# Altium PCB MBHP_CORE_LPC176x.PcbDoc (part 2 of 2)
Units mm, origin at the board's own origin, x right, y up, seen from the top; angles counter-clockwise.
Board outline 120 x 100 mm, 2 copper layers (Top Layer, Bottom Layer), stack 1.571 mm thick; 70 components, 109 nets, 446 pads, 2 vias.
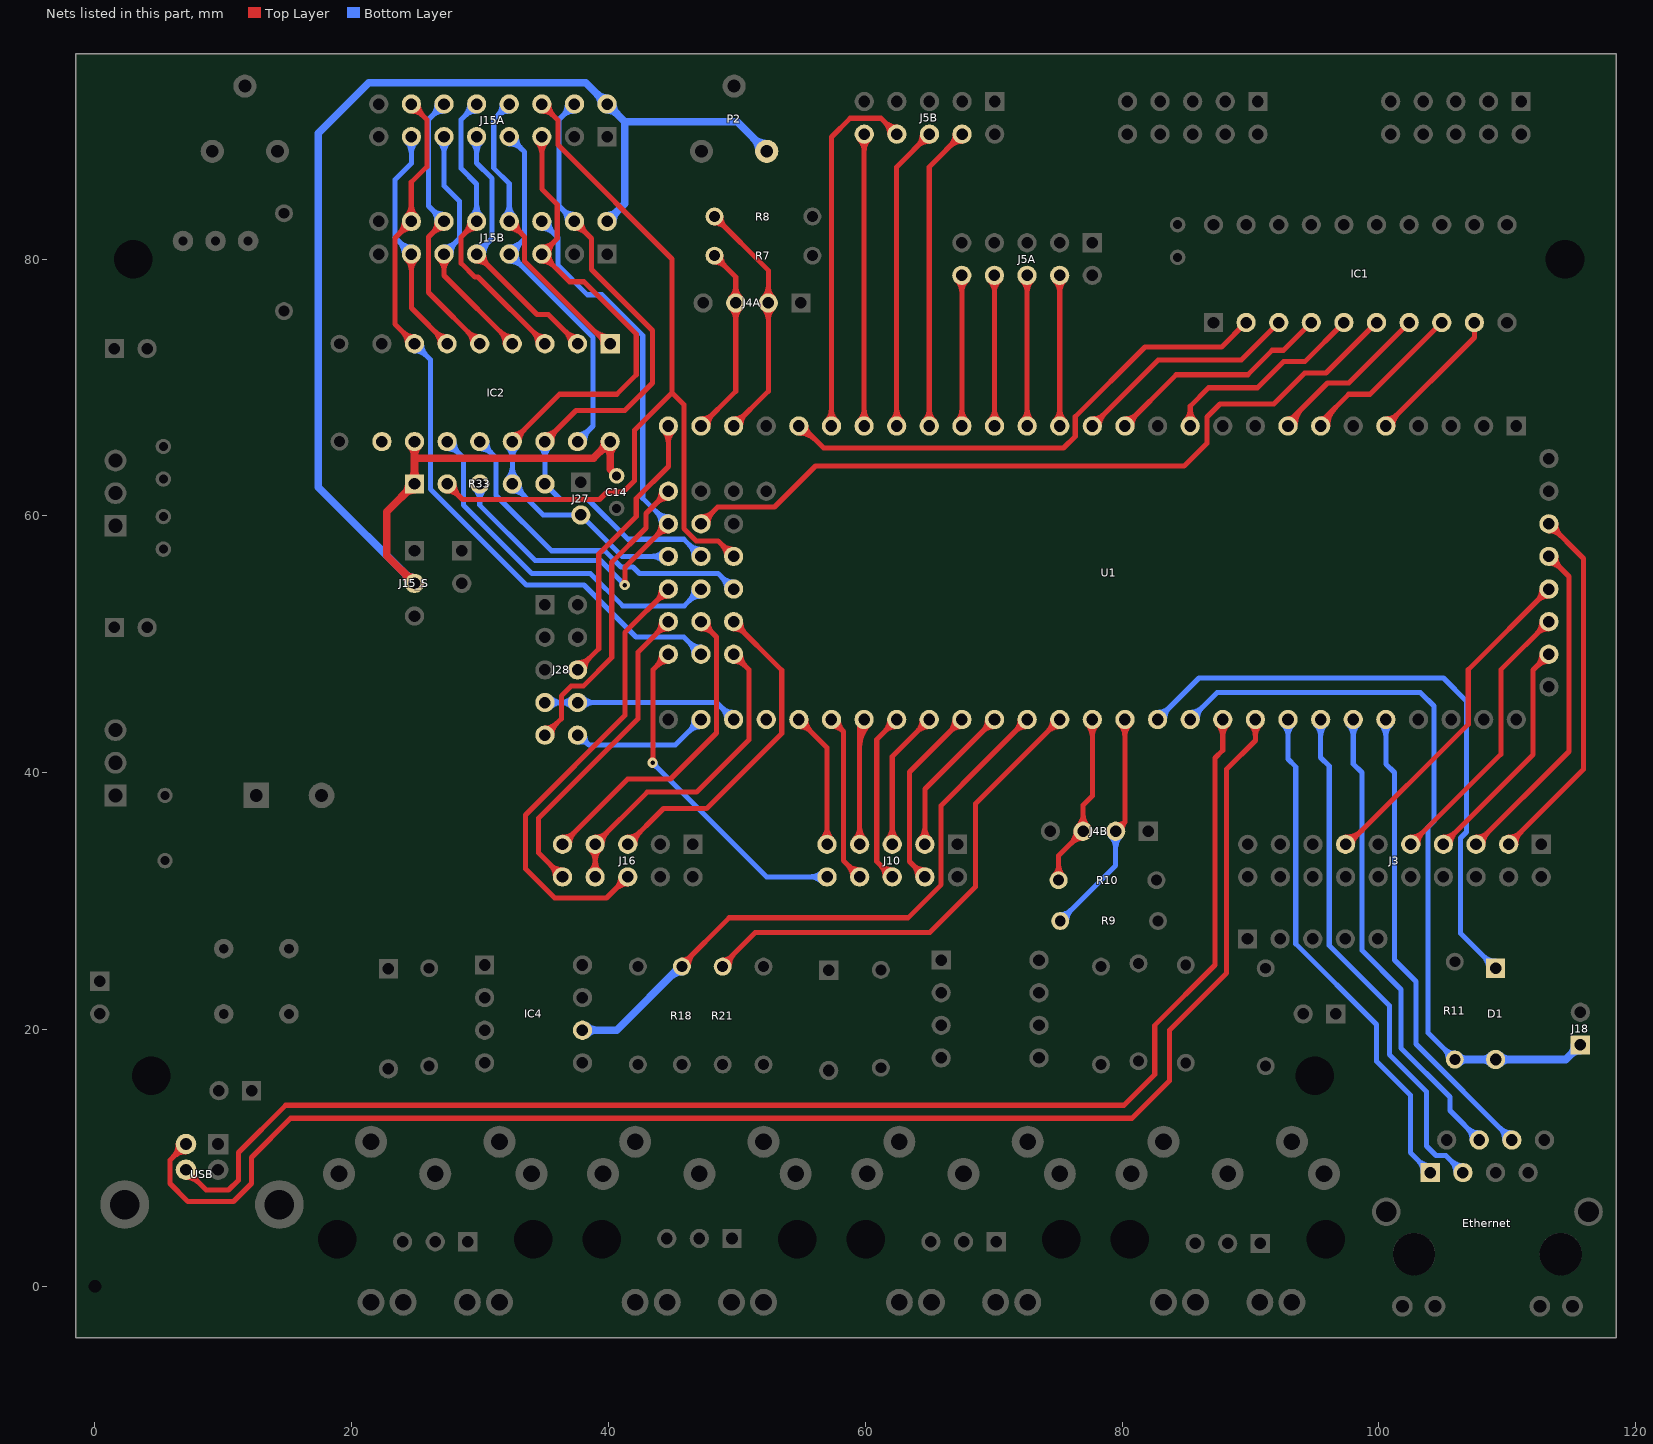
[diagram p2: the nets of this part, all layers, seen from the top]

## Via types
v1: diameter 0.8, hole 0.35, Top Layer to Bottom Layer, 2 vias

## Nets (pads, with @x,y where several pads share a name; then routed paths per layer and width w, separated by ;. In a path a pad name is that pad's centre, name@x,y a point inside that pad or via, vN(x,y) a via of type N, cw(c..) or ccw(c..) an arc to the next point about the centre after c; other vN are vias at no path point) (continued)
P0.2: J5B.10 U1.21 | length 26.9
  Top Layer w0.4: U1.21@59.518,67.389 ccw(c58.579,68.328) 59.907,68.328 ccw(c61.235,68.328) U1.21@60.296,67.389 ; J5B.10@59.531,89.341 cw(c58.624,88.434) 59.907,88.434 ; U1.21@59.907,67 J5B.10@59.907,89.73 ; 59.907,88.371 cw(c61.279,88.371) J5B.10@60.309,89.341
P0.3: J5B.8 U1.22 | length 32.9
  Top Layer w0.4: U1.22@56.978,67.389 ccw(c56.039,68.328) 57.367,68.328 ccw(c58.695,68.328) U1.22@57.756,67.389 ; U1.22@57.367,67 57.367,89.498 58.835,90.966 61.224,90.966 J5B.8@62.46,89.73 ; J5B.8@61.91,89.73 ccw(c60.582,89.73) 61.521,90.669 ccw(c62.46,91.608) J5B.8@62.46,90.28
P0.4: D1.1 J18.1 R11.1 U1.38 | length 69.7
  Bottom Layer w0.4: U1.38@85.307,44.14 87.395,46.228 103.251,46.228 104.291,45.188 104.291,36.219 103.825,35.753 103.825,19.746 R11.1@105.918,17.653 ; U1.38@85.307,44.69 ccw(c85.307,46.018) 86.246,45.079 ccw(c87.185,44.14) U1.38@85.857,44.14 ; R11.1@105.418,17.653 ccw(c104.211,17.653) 105.064,18.507 ccw(c105.918,19.36) R11.1@105.918,18.153
  Bottom Layer w0.6: R11.1@105.918,17.653 109.087,17.653 D1.1@109.093,17.659 114.56,17.659 J18.1@115.697,18.796 ; R11.1@106.201,17.37 cw(c106.884,16.687) 106.884,17.653 cw(c106.884,18.619) R11.1@106.201,17.936 ; 107.992,17.653 ccw(c107.992,18.76) D1.1@108.775,17.977 ; 108.021,17.653 cw(c108.021,16.587) D1.1@108.775,17.341 ; D1.1@109.411,17.341 cw(c110.179,16.573) 110.179,17.659 cw(c110.179,18.745) D1.1@109.411,17.977 ; J18.1@115.247,18.796 cw(c114.161,18.796) 114.929,18.028 cw(c115.697,17.26) J18.1@115.697,18.346
P0.5: D1.2 U1.39 | length 52.5
  Bottom Layer w0.4: U1.39@82.767,44.14 85.998,47.371 105.029,47.371 106.831,45.569 106.831,35.382 106.365,34.916 106.365,27.487 D1.2@109.093,24.759 ; U1.39@82.767,44.69 ccw(c82.767,46.018) 83.706,45.079 ccw(c84.645,44.14) U1.39@83.317,44.14 ; D1.2@108.543,24.759 ccw(c107.215,24.759) 108.154,25.698 ccw(c109.093,26.637) D1.2@109.093,25.309
P0.6: IC1.7 U1.8 | length 15.8
  Top Layer w0.4: U1.8@92.927,67 92.927,67.279 96.006,70.358 97.663,70.358 IC1.7@102.362,75.057 ; U1.8@92.927,67.55 ccw(c92.927,68.204) 93.39,67.742 ; U1.8@93.077,67 cw(c94.113,67) 93.38,67.732 ; U1.8@93.477,67 cw(c95.478,67) 94.063,68.415
P0.7: IC1.8 U1.7 | length 15.8
  Top Layer w0.4: U1.7@95.467,67 95.467,67.279 97.657,69.469 99.314,69.469 IC1.8@104.902,75.057 ; U1.7@95.467,67.55 ccw(c95.467,68.204) 95.93,67.742 ; U1.7@95.617,67 cw(c96.653,67) 95.92,67.732 ; U1.7@96.017,67 cw(c98.018,67) 96.603,68.415
P0.9: IC1.9 U1.5 | length 13
  Top Layer w0.4: U1.5@100.547,67 107.442,73.895 IC1.9@107.442,75.057 ; U1.5@100.547,67.55 ccw(c100.547,68.878) 101.486,67.939 ccw(c102.425,67) U1.5@101.097,67
P0.10: J4B.2 R9.2 U1.40 | length 25.2
  Top Layer w0.4: J4B.2@79.502,35.433 80.227,36.158 ; J4B.2@79.611,35.972 ccw(c79.746,36.639) 80.227,36.158 ; U1.40@79.838,43.751 cw(c78.899,42.812) 80.227,42.812 cw(c81.555,42.812) U1.40@80.616,43.751 ; J4B.2@80.041,35.542 cw(c80.708,35.677) 80.227,36.158 ; U1.40@80.227,44.14 80.227,36.158
  Bottom Layer w0.4: R9.2@75.184,28.448 79.502,32.766 J4B.2@79.502,35.433 ; R9.2@75.184,28.948 ccw(c75.184,30.155) 76.038,29.302 ccw(c76.891,28.448) R9.2@75.684,28.448 ; J4B.2@79.113,35.044 cw(c78.174,34.105) 79.502,34.105 cw(c80.83,34.105) J4B.2@79.891,35.044
P0.11: J4B.3 R10.2 U1.41 | length 21.8
  Top Layer w0.4: R10.2@74.703,31.977 ccw(c73.85,32.83) 75.057,32.83 ccw(c76.264,32.83) R10.2@75.411,31.977 ; R10.2@75.057,31.623 75.057,33.528 J4B.3@76.962,35.433 76.962,37.465 77.687,38.19 U1.41@77.687,44.14 ; J4B.3@76.412,35.433 cw(c75.084,35.433) 76.023,34.494 cw(c76.962,33.555) J4B.3@76.962,34.883 ; J4B.3@76.573,35.822 ccw(c75.634,36.761) 76.962,36.761 ccw(c78.29,36.761) J4B.3@77.351,35.822 ; U1.41@77.298,43.751 cw(c76.359,42.812) 77.687,42.812 cw(c79.015,42.812) U1.41@78.076,43.751
P0.15: IC1.4 U1.13 | length 19.9
  Top Layer w0.4: U1.13@80.227,67 84.22,70.993 89.789,70.993 91.694,72.898 92.583,72.898 IC1.4@94.742,75.057 ; U1.13@80.227,67.55 ccw(c80.227,68.878) 81.166,67.939 ccw(c82.105,67) U1.13@80.777,67
P0.16: IC1.3 U1.14 | length 19.9
  Top Layer w0.4: U1.14@77.687,67 82.823,72.136 89.281,72.136 IC1.3@92.202,75.057 ; U1.14@77.687,67.55 ccw(c77.687,68.878) 78.626,67.939 ccw(c79.565,67) U1.14@78.237,67
P0.18: IC1.5 U1.11 | length 18.3
  Top Layer w0.4: U1.11@84.918,67.389 ccw(c83.979,68.328) 85.307,68.328 ccw(c86.635,68.328) U1.11@85.696,67.389 ; U1.11@85.307,67 85.307,68.543 86.741,69.977 90.545,69.977 92.577,72.009 94.234,72.009 IC1.5@97.282,75.057
P0.21: IC1.2 U1.23 | length 43.3
  Top Layer w0.4: U1.23@54.827,66.45 cw(c54.827,64.591) 56.141,65.906 ; U1.23@54.827,66.85 cw(c54.827,65.957) 55.459,66.588 ; U1.23@54.827,67 55.047,67 56.769,65.278 75.438,65.278 76.351,66.191 76.351,67.715 81.788,73.152 87.757,73.152 IC1.2@89.662,75.057 ; U1.23@55.377,67 ccw(c56.174,67) 55.61,66.437
P0.23: J5A.4 U1.15 | length 15.9
  Top Layer w0.4: J5A.4@74.751,78.341 cw(c73.795,77.385) 75.147,77.385 ; U1.15@74.758,67.389 ccw(c73.819,68.328) 75.147,68.328 ccw(c76.475,68.328) U1.15@75.536,67.389 ; U1.15@75.147,67 J5A.4@75.147,78.73 ; 75.147,77.419 cw(c76.451,77.419) J5A.4@75.529,78.341
P0.24: J5A.6 U1.16 | length 16
  Top Layer w0.4: J5A.6@72.211,78.341 cw(c71.255,77.385) 72.607,77.385 ; U1.16@72.218,67.389 ccw(c71.279,68.328) 72.607,68.328 ccw(c73.935,68.328) U1.16@72.996,67.389 ; U1.16@72.607,66.929 J5A.6@72.607,78.73 ; 72.607,77.419 cw(c73.911,77.419) J5A.6@72.989,78.341
P0.25: J5A.8 U1.17 | length 15.9
  Top Layer w0.4: J5A.8@69.671,78.341 cw(c68.715,77.385) 70.067,77.385 ; U1.17@69.678,67.389 ccw(c68.739,68.328) 70.067,68.328 ccw(c71.395,68.328) U1.17@70.456,67.389 ; U1.17@70.067,67 J5A.8@70.067,78.73 ; 70.067,77.419 cw(c71.371,77.419) J5A.8@70.449,78.341
P0.26: J5A.10 U1.18 | length 15.9
  Top Layer w0.4: J5A.10@67.131,78.341 cw(c66.175,77.385) 67.527,77.385 ; U1.18@67.138,67.389 ccw(c66.199,68.328) 67.527,68.328 ccw(c68.855,68.328) U1.18@67.916,67.389 ; U1.18@67.527,67 J5A.10@67.527,78.73 ; 67.527,77.419 cw(c68.831,77.419) J5A.10@67.909,78.341
P0.27: J4A.2 R8.2 U1.25 | length 27.3
  Top Layer w0.4: R8.2@48.26,82.812 cw(c48.26,81.605) 49.114,82.458 cw(c49.967,83.312) R8.2@48.76,83.312 ; R8.2@48.26,83.312 52.451,79.121 J4A.2@52.451,76.581 52.451,69.704 U1.25@49.747,67 ; U1.25@49.747,67.55 ccw(c49.747,68.878) 50.686,67.939 ccw(c51.625,67) U1.25@50.297,67 ; J4A.2@52.062,76.192 cw(c51.123,75.253) 52.451,75.253 cw(c53.779,75.253) J4A.2@52.84,76.192 ; J4A.2@52.062,76.97 ccw(c51.123,77.909) 52.451,77.909 ccw(c53.779,77.909) J4A.2@52.84,76.97
P0.28: J4A.3 R7.2 U1.26 | length 23.2
  Top Layer w0.4: U1.26@47.207,67 49.911,69.704 J4A.3@49.911,76.581 49.911,78.613 R7.2@48.26,80.264 ; U1.26@47.207,67.55 ccw(c47.207,68.878) 48.146,67.939 ccw(c49.085,67) U1.26@47.757,67 ; R7.2@48.26,79.764 cw(c48.26,78.557) 49.114,79.41 cw(c49.967,80.264) R7.2@48.76,80.264 ; J4A.3@49.522,76.192 cw(c48.583,75.253) 49.911,75.253 cw(c51.239,75.253) J4A.3@50.3,76.192 ; J4A.3@49.522,76.97 ccw(c48.583,77.909) 49.911,77.909 ccw(c51.239,77.909) J4A.3@50.3,76.97
P1.18: J10.10 U1.81 | length 31.9
  Top Layer w0.4: v1@43.293,40.908 ccw(c42.881,41.32) 43.463,41.32 ; v1(43.434,40.767) 43.463,40.796 43.463,48.016 U1.81@44.667,49.22 ; 43.463,41.18 ccw(c43.847,41.18) v1@43.575,40.908 ; U1.81@44.117,49.22 cw(c42.789,49.22) 43.728,48.281 cw(c44.667,47.342) U1.81@44.667,48.67
  Bottom Layer w0.4: v1@43.434,40.567 cw(c43.434,40.084) 43.775,40.426 cw(c44.117,40.767) v1@43.634,40.767 ; v1(43.434,40.767) 52.324,31.877 J10.10@57.023,31.877 ; J10.10@56.634,31.488 ccw(c55.695,30.549) 55.695,31.877 ccw(c55.695,33.205) J10.10@56.634,32.266
P1.20: J16.7 J16.8 U1.79 | length 33.4
  Top Layer w0.4: J16.8@38.571,32.266 ccw(c37.632,33.205) 38.96,33.205 ccw(c40.288,33.205) J16.8@39.349,32.266 ; J16.7@38.571,34.028 cw(c37.632,33.089) 38.96,33.089 cw(c40.288,33.089) J16.7@39.349,34.028 ; J16.8@38.96,31.877 J16.7@38.96,34.417 43.024,38.481 46.863,38.481 50.927,42.545 50.951,42.545 50.951,48.016 U1.79@49.747,49.22 ; J16.7@38.96,34.967 ccw(c38.96,36.295) 39.899,35.356 ccw(c40.838,34.417) J16.7@39.51,34.417 ; U1.79@49.747,48.67 cw(c49.747,47.342) 50.686,48.281 cw(c51.625,49.22) U1.79@50.297,49.22
P1.21: J16.10 U1.78 | length 29
  Top Layer w0.4: J16.10@35.87,31.877 ccw(c34.542,31.877) 35.481,32.816 ccw(c36.42,33.755) J16.10@36.42,32.427 ; J16.10@36.42,31.877 34.544,33.753 34.544,36.449 42.291,44.196 42.291,49.384 U1.78@44.667,51.76 ; U1.78@44.117,51.76 cw(c42.789,51.76) 43.728,50.821 cw(c44.667,49.882) U1.78@44.667,51.21
P1.22: J16.9 U1.77 | length 28.9
  Top Layer w0.4: J16.9@36.42,34.417 41.5,39.497 44.831,39.497 48.411,43.077 48.411,50.556 U1.77@47.207,51.76 ; J16.9@36.42,34.967 ccw(c36.42,36.295) 37.359,35.356 ccw(c38.298,34.417) J16.9@36.97,34.417 ; U1.77@47.207,51.21 cw(c47.207,49.882) 48.146,50.821 cw(c49.085,51.76) U1.77@47.757,51.76
P1.23: J16.5 U1.76 | length 30
  Top Layer w0.4: J16.5@41.5,34.417 44.294,37.211 47.649,37.211 53.491,43.053 53.491,47.982 U1.76@49.73,51.743 ; J16.5@41.5,34.967 ccw(c41.5,36.295) 42.439,35.356 ccw(c43.378,34.417) J16.5@42.05,34.417 ; U1.76@49.747,51.21 cw(c49.747,49.964) 50.628,50.845 ; U1.76@50.297,51.76 ccw(c51.707,51.76) 50.71,50.763
P1.24: J16.6 U1.75 | length 40.2
  Top Layer w0.4: J16.6@40.95,31.877 cw(c39.622,31.877) 40.561,30.938 cw(c41.5,29.999) J16.6@41.5,31.327 ; J16.6@41.5,31.877 39.849,30.226 35.814,30.226 33.528,32.512 33.528,36.703 41.275,44.45 41.275,50.908 U1.75@44.667,54.3 ; U1.75@44.117,54.3 cw(c42.789,54.3) 43.728,53.361 cw(c44.667,52.422) U1.75@44.667,53.75
P1.25: IC2.11 U1.74 | length 31.9
  Bottom Layer w0.4: IC2.11@27.432,65.236 cw(c27.432,63.908) 28.371,64.847 cw(c29.31,65.786) IC2.11@27.982,65.786 ; IC2.11@27.432,65.786 28.702,64.516 28.702,60.833 34.036,55.499 38.608,55.499 41.114,52.993 45.9,52.993 U1.74@47.207,54.3 ; U1.74@46.657,54.3 cw(c45.329,54.3) 46.268,53.361 cw(c47.207,52.422) U1.74@47.207,53.75
P1.26: IC2.12 U1.73 | length 30.4
  Bottom Layer w0.4: IC2.12@29.972,65.236 cw(c29.972,63.908) 30.911,64.847 cw(c31.85,65.786) IC2.12@30.522,65.786 ; IC2.12@29.972,65.786 31.242,64.516 31.242,61.595 35.56,57.277 39.715,57.277 40.985,56.007 41.91,56.007 42.413,55.504 48.543,55.504 U1.73@49.747,54.3 ; U1.73@49.197,54.3 ccw(c47.869,54.3) 48.808,55.239 ccw(c49.747,56.178) U1.73@49.747,54.85
P1.27: IC2.13 J15A.11 J15B.11 J27.2 R33.4 U1.72 | length 69.5
  Top Layer w0.4: IC2.13@32.512,65.786 36.195,69.469 40.64,69.469 42.164,70.993 42.164,74.168 38.1,78.232 36.957,78.232 34.81,80.379 J15B.11@34.81,80.391 36.014,81.595 36.014,84.255 34.81,85.459 J15A.11@34.81,89.535 ; IC2.13@32.512,66.336 ccw(c32.512,67.664) 33.451,66.725 ccw(c34.39,65.786) IC2.13@33.062,65.786 ; J15A.11@34.421,89.146 cw(c33.482,88.207) 34.81,88.207 cw(c36.138,88.207) J15A.11@35.199,89.146 ; J15B.11@34.81,79.841 cw(c34.81,78.542) 35.728,79.461 ; J15B.11@34.81,80.941 ccw(c34.81,82.269) 35.749,81.33 ccw(c36.688,80.391) 35.36,80.391 ccw(c36.717,80.391) 35.757,79.432
  Bottom Layer w0.4: R33.4@32.123,62.873 ccw(c31.184,63.812) 32.512,63.812 ccw(c33.84,63.812) R33.4@32.901,62.873 ; IC2.13@32.123,65.397 cw(c31.184,64.458) 32.512,64.458 cw(c33.84,64.458) IC2.13@32.901,65.397 ; R33.4@32.512,61.934 cw(c32.512,60.606) 33.451,61.545 cw(c34.39,62.484) R33.4@33.062,62.484 ; IC2.13@32.512,65.786 R33.4@32.512,62.484 34.925,60.071 J27.2@37.846,60.071 41.077,56.84 U1.72@44.667,56.84 ; U1.72@44.278,56.451 ccw(c43.339,55.512) 43.339,56.84 ccw(c43.339,58.168) U1.72@44.278,57.229
P1.28: IC2.14 J15A.14 J15B.14 R33.5 U1.71 | length 65.8
  Top Layer w0.4: IC2.14@35.052,65.786 37.465,68.199 41.275,68.199 43.434,70.358 43.434,74.439 38.686,79.187 38.686,81.595 J15B.14@37.35,82.931 ; IC2.14@35.052,66.336 ccw(c35.052,67.664) 35.991,66.725 ccw(c36.93,65.786) IC2.14@35.602,65.786 ; J15B.14@37.35,82.381 cw(c37.35,81.053) 38.289,81.992 cw(c39.228,82.931) J15B.14@37.9,82.931
  Bottom Layer w0.4: IC2.14@34.663,65.397 cw(c33.724,64.458) 35.052,64.458 cw(c36.38,64.458) IC2.14@35.441,65.397 ; IC2.14@35.052,65.786 R33.5@35.052,62.484 36.256,61.28 38.415,61.28 41.519,58.176 45.871,58.176 U1.71@47.207,56.84 ; J15B.14@36.8,82.931 ccw(c35.472,82.931) 36.411,83.87 ccw(c37.35,84.809) J15B.14@37.35,83.481 ; J15A.14@36.8,92.075 cw(c35.472,92.075) 36.411,91.136 cw(c37.35,90.197) J15A.14@37.35,91.525 ; J15B.14@37.35,82.931 36.146,84.135 36.146,90.871 J15A.14@37.35,92.075 ; U1.71@46.657,56.84 ccw(c45.329,56.84) 46.268,57.779 ccw(c47.207,58.718) U1.71@47.207,57.39
P1.29: J15A.12 R33.2 U1.70 | length 72.5
  Top Layer w0.4: R33.2@27.432,61.934 cw(c27.432,60.606) 28.371,61.545 cw(c29.31,62.484) R33.2@27.982,62.484 ; R33.2@27.432,62.484 28.636,61.28 39.309,61.28 39.878,61.849 41.148,61.849 42.037,62.738 42.037,66.675 44.958,69.596 ; J15A.12@34.81,91.525 cw(c34.81,90.197) 35.749,91.136 cw(c36.688,92.075) J15A.12@35.36,92.075 ; J15A.12@34.81,92.075 36.068,90.817 36.068,88.9 44.958,80.01 44.958,69.596 ; U1.70@49.197,56.84 ccw(c47.869,56.84) 48.808,57.779 ccw(c49.747,58.718) U1.70@49.747,57.39 ; U1.70@49.747,56.84 48.543,58.044 46.84,58.044 45.871,59.013 45.871,68.683 44.958,69.596
P1.30: J5B.4 U1.19 | length 28
  Top Layer w0.4: U1.19@64.598,67.389 ccw(c63.659,68.328) 64.987,68.328 ccw(c66.315,68.328) U1.19@65.376,67.389 ; U1.19@64.987,67 64.987,87.177 J5B.4@67.54,89.73 ; J5B.4@66.99,89.73 cw(c65.662,89.73) 66.601,88.791 cw(c67.54,87.852) J5B.4@67.54,89.18
P1.31: J5B.6 U1.20 | length 28
  Top Layer w0.4: U1.20@62.058,67.389 ccw(c61.119,68.328) 62.447,68.328 ccw(c63.775,68.328) U1.20@62.836,67.389 ; U1.20@62.447,66.929 62.447,87.177 J5B.6@65,89.73 ; J5B.6@64.45,89.73 cw(c63.122,89.73) 64.061,88.791 cw(c65,87.852) J5B.6@65,89.18
P2.0: R21.1 U1.42 | length 41.9
  Top Layer w0.4: R21.1@48.895,25.019 51.435,27.559 65.024,27.559 68.58,31.115 68.58,37.573 U1.42@75.147,44.14 ; R21.1@48.895,25.392 ccw(c48.895,26.293) 49.532,25.656 ; R21.1@49.395,24.892 cw(c50.909,24.892) 49.838,25.962 ; U1.42@74.597,44.14 cw(c73.269,44.14) 74.208,43.201 cw(c75.147,42.262) U1.42@75.147,43.59
P2.1: IC4.6 R18.1 U1.43 | length 55.5
  Top Layer w0.4: R18.1@45.72,25.019 49.403,28.702 63.341,28.702 65.913,31.274 65.913,37.446 69.215,40.748 U1.43@72.607,44.14 ; R18.1@45.72,25.392 ccw(c45.72,26.292) 46.357,25.656 ; R18.1@46.22,24.892 cw(c47.734,24.892) 46.663,25.962 ; U1.43@72.057,44.14 cw(c70.729,44.14) 71.668,43.201 cw(c72.607,42.262) U1.43@72.607,43.59
  Bottom Layer w0.6: IC4.6@37.973,19.939 40.64,19.939 R18.1@45.72,25.019 ; IC4.6@38.291,19.621 cw(c39.059,18.853) 39.059,19.939 cw(c39.059,21.025) IC4.6@38.291,20.257 ; 44.82,24.119 cw(c45.72,23.22) R18.1@45.72,24.492 ; 45.127,24.426 ccw(c44.661,24.892) R18.1@45.32,24.892
P2.2: J10.3 U1.44 | length 16.1
  Top Layer w0.4: J10.3@64.254,34.806 ccw(c63.315,35.745) 64.643,35.745 ccw(c65.971,35.745) J10.3@65.032,34.806 ; J10.3@64.643,34.417 64.643,38.716 U1.44@70.067,44.14 ; U1.44@69.517,44.14 cw(c68.189,44.14) 69.128,43.201 cw(c70.067,42.262) U1.44@70.067,43.59
P2.3: J10.4 U1.45 | length 18.6
  Top Layer w0.4: J10.4@64.093,31.877 ccw(c62.765,31.877) 63.704,32.816 ccw(c64.643,33.755) J10.4@64.643,32.427 ; J10.4@64.643,31.877 63.439,33.081 63.439,40.052 U1.45@67.527,44.14 ; U1.45@66.977,44.14 cw(c65.649,44.14) 66.588,43.201 cw(c67.527,42.262) U1.45@67.527,43.59
P2.4: J10.5 U1.46 | length 15.1
  Top Layer w0.4: J10.5@61.714,34.806 ccw(c60.775,35.745) 62.103,35.745 ccw(c63.431,35.745) J10.5@62.492,34.806 ; J10.5@62.103,34.417 62.103,41.256 U1.46@64.987,44.14 ; U1.46@64.437,44.14 cw(c63.109,44.14) 64.048,43.201 cw(c64.987,42.262) U1.46@64.987,43.59
P2.5: J10.6 U1.47 | length 17.6
  Top Layer w0.4: J10.6@61.553,31.877 ccw(c60.225,31.877) 61.164,32.816 ccw(c62.103,33.755) J10.6@62.103,32.427 ; U1.47@61.897,44.14 cw(c60.569,44.14) 61.508,43.201 cw(c62.447,42.262) U1.47@62.447,43.59 ; J10.6@62.103,31.877 60.899,33.081 60.899,42.592 U1.47@62.447,44.14
P2.6: J10.7 U1.48 | length 15.1
  Top Layer w0.4: J10.7@59.174,34.806 ccw(c58.235,35.745) 59.563,35.745 ccw(c60.891,35.745) J10.7@59.952,34.806 ; J10.7@59.563,34.417 59.563,43.796 U1.48@59.907,44.14 ; 59.563,41.982 cw(c62.065,41.982) U1.48@60.296,43.751 ; 59.563,42.947 cw(c61.1,42.947) U1.48@60.013,44.034
P2.7: J10.8 U1.49 | length 17.3
  Top Layer w0.4: U1.49@57.367,44.14 58.293,43.214 ; U1.49@57.372,43.59 cw(c57.385,42.306) 58.293,43.214 ; U1.49@57.917,44.135 ccw(c59.201,44.122) 58.293,43.214 ; J10.8@59.013,31.877 ccw(c57.685,31.877) 58.624,32.816 ccw(c59.563,33.755) J10.8@59.563,32.427 ; J10.8@59.563,31.877 58.293,33.147 58.293,43.214
P2.8: J10.9 U1.50 | length 14.8
  Top Layer w0.4: U1.50@54.827,43.59 cw(c54.827,42.262) 55.766,43.201 cw(c56.705,44.14) U1.50@55.377,44.14 ; U1.50@54.827,44.14 57.023,41.944 J10.9@57.023,34.417 ; J10.9@56.634,34.806 ccw(c55.695,35.745) 57.023,35.745 ccw(c58.351,35.745) J10.9@57.412,34.806
P2.10: U1.51
P2.11: J28.7 J28.8 U1.52 | length 23.6
  Bottom Layer w0.4: J28.7@35.052,45.466 48.421,45.466 U1.52@49.747,44.14 ; J28.7@35.441,45.071 cw(c36.394,44.118) 36.394,45.466 ; J28.7@35.441,45.849 ccw(c36.365,46.773) 36.365,45.466 ; 36.25,45.466 cw(c36.25,44.118) J28.8@37.203,45.071 ; 36.279,45.466 ccw(c36.279,46.773) J28.8@37.203,45.849 ; J28.8@37.981,45.071 cw(c38.934,44.118) 38.934,45.466 ; J28.8@37.981,45.849 ccw(c38.905,46.773) 38.905,45.466 ; U1.52@49.197,44.14 ccw(c47.869,44.14) 48.808,45.079 ccw(c49.747,46.018) U1.52@49.747,44.69
P2.12: J28.10 U1.53 | length 14.2
  Bottom Layer w0.4: J28.10@37.715,42.384 cw(c37.899,41.583) 38.481,42.164 ; J28.10@37.846,42.799 38.481,42.164 ; J28.10@38.142,42.92 ccw(c39.149,42.92) 38.437,42.208 ; U1.53@46.657,44.14 cw(c45.329,44.14) 46.268,43.201 cw(c47.207,42.262) U1.53@47.207,43.59 ; U1.53@47.207,44.14 45.231,42.164 38.481,42.164
P2.13: J28.6 U1.27 | length 26.1
  Top Layer w0.4: J28.6@37.592,48 39.243,49.651 39.243,57.023 42.164,59.944 42.164,61.341 44.667,63.844 U1.27@44.667,67 ; J28.6@37.592,48.55 ccw(c37.592,49.878) 38.531,48.939 ccw(c39.47,48) J28.6@38.142,48 ; U1.27@44.278,66.611 cw(c43.339,65.672) 44.667,65.672 cw(c45.995,65.672) U1.27@45.056,66.611
P3.25: J15B.12 R33.3 U1.69 | length 59.9
  Top Layer w0.4: v1@41.134,54.751 ccw(c40.792,55.093) 41.275,55.093 ccw(c41.758,55.093) v1@41.416,54.751 ; v1(41.275,54.61) 41.275,55.988 U1.69@44.667,59.38 ; U1.69@44.117,59.38 cw(c42.789,59.38) 43.728,58.441 cw(c44.667,57.502) U1.69@44.667,58.83
  Bottom Layer w0.4: R33.3@29.583,62.095 cw(c28.644,61.156) 29.972,61.156 cw(c31.3,61.156) R33.3@30.361,62.095 ; R33.3@29.972,62.484 29.972,60.833 34.29,56.515 39.37,56.515 v1(41.275,54.61) ; J15B.12@34.81,82.381 cw(c34.81,81.053) 35.749,81.992 cw(c36.688,82.931) J15B.12@35.36,82.931 ; J15B.12@34.81,82.931 36.07,81.671 36.07,79.5 38.354,77.216 39.497,77.216 42.672,74.041 42.672,61.375 U1.69@44.667,59.38 ; v1@41.075,54.61 ccw(c40.592,54.61) 40.934,54.951 ccw(c41.275,55.293) v1@41.275,54.81 ; U1.69@44.117,59.38 ccw(c42.789,59.38) 43.728,60.319 ccw(c44.667,61.258) U1.69@44.667,59.93
P3.26: IC1.6 U1.68 | length 62.4
  Top Layer w0.4: U1.68@47.207,59.38 48.516,60.689 52.942,60.689 56.134,63.881 84.836,63.881 86.614,65.659 86.614,67.691 87.63,68.707 91.815,68.707 94.228,71.12 95.885,71.12 IC1.6@99.822,75.057 ; U1.68@47.207,59.93 ccw(c47.207,61.258) 48.146,60.319 ccw(c49.085,59.38) U1.68@47.757,59.38
P4.29: J28.9 U1.66 | length 27.7
  Top Layer w0.4: J28.9@35.052,42.92 36.328,44.196 36.328,45.98 37.084,46.736 38.031,46.736 40.259,48.964 40.259,56.393 42.926,59.06 42.926,60.179 U1.66@44.667,61.92 ; J28.9@35.052,43.47 ccw(c35.052,44.798) 35.991,43.859 ccw(c36.93,42.92) J28.9@35.602,42.92 ; U1.66@44.117,61.92 cw(c42.789,61.92) 43.728,60.981 cw(c44.667,60.042) U1.66@44.667,61.37
Q0: IC2.15 J15A.9 J15B.9 | length 36.3
  Bottom Layer w0.4: J15B.9@32.27,79.841 cw(c32.27,78.417) 33.277,79.424 ; J15B.9@32.27,80.941 ccw(c32.27,82.269) 33.209,81.33 ccw(c34.148,80.391) 32.82,80.391 ccw(c34.052,80.391) 33.181,79.52 ; J15A.9@32.27,88.985 cw(c32.27,87.657) 33.209,88.596 cw(c34.148,89.535) J15A.9@32.82,89.535 ; J15A.9@32.27,89.535 33.474,88.331 33.474,81.595 J15B.9@32.27,80.391 32.31,80.391 38.796,73.905 38.796,66.99 IC2.15@37.592,65.786 ; IC2.15@37.592,66.336 ccw(c37.592,67.664) 38.531,66.725 ccw(c39.47,65.786) IC2.15@38.142,65.786
Q1: IC2.1 J15A.10 J15B.10 | length 32.2
  Top Layer w0.4: J15B.10@32.27,82.381 cw(c32.27,81.053) 33.209,81.992 cw(c34.148,82.931) J15B.10@32.82,82.931 ; J15B.10@32.27,82.931 33.474,81.727 33.474,79.81 39.878,73.406 IC2.1@40.132,73.406 ; 38.759,74.525 ccw(c40.132,75.897) IC2.1@40.132,73.956 ; 39.373,73.911 cw(c38.867,73.406) IC2.1@39.582,73.406 ; IC2.1@39.442,73.842 ccw(c40.132,74.531) IC2.1@40.132,73.556
  Bottom Layer w0.4: J15A.10@31.72,92.075 cw(c30.392,92.075) 31.331,91.136 cw(c32.27,90.197) J15A.10@32.27,91.525 ; J15B.10@31.881,83.32 ccw(c30.942,84.259) 32.27,84.259 ccw(c33.598,84.259) J15B.10@32.659,83.32 ; J15B.10@32.27,82.931 32.27,85.876 31.066,87.08 31.066,90.871 J15A.10@32.27,92.075
Q2: IC2.2 J15A.7 J15B.7 | length 29.2
  Top Layer w0.4: J15B.7@29.73,79.841 cw(c29.73,78.513) 30.669,79.452 cw(c31.608,80.391) J15B.7@30.28,80.391 ; J15B.7@29.73,80.391 34.429,75.692 35.306,75.692 IC2.2@37.592,73.406 ; IC2.2@37.042,73.406 ccw(c35.714,73.406) 36.653,74.345 ccw(c37.592,75.284) IC2.2@37.592,73.956
  Bottom Layer w0.4: J15A.7@29.341,89.146 cw(c28.402,88.207) 29.73,88.207 cw(c31.058,88.207) J15A.7@30.119,89.146 ; J15B.7@29.73,80.391 30.934,81.595 30.934,86.287 29.73,87.491 J15A.7@29.73,89.535 ; J15B.7@29.73,80.941 ccw(c29.73,82.269) 30.669,81.33 ccw(c31.608,80.391) J15B.7@30.28,80.391
Q3: IC2.3 J15A.8 J15B.8 | length 31.4
  Top Layer w0.4: J15B.8@29.18,82.931 cw(c27.852,82.931) 28.791,81.992 cw(c29.73,81.053) J15B.8@29.73,82.381 ; J15B.8@29.73,82.931 28.526,81.727 28.526,79.678 29.591,78.613 29.845,78.613 IC2.3@35.052,73.406 ; IC2.3@34.502,73.406 ccw(c33.174,73.406) 34.113,74.345 ccw(c35.052,75.284) IC2.3@35.052,73.956
  Bottom Layer w0.4: J15A.8@29.18,92.075 cw(c27.852,92.075) 28.791,91.136 cw(c29.73,90.197) J15A.8@29.73,91.525 ; J15B.8@29.341,83.32 ccw(c28.402,84.259) 29.73,84.259 ccw(c31.058,84.259) J15B.8@30.119,83.32 ; J15B.8@29.73,82.931 29.73,85.84 28.526,87.044 28.526,90.871 J15A.8@29.73,92.075
Q4: IC2.4 J15A.5 J15B.5 | length 27.7
  Top Layer w0.4: J15B.5@26.801,80.002 cw(c25.862,79.063) 27.19,79.063 cw(c28.518,79.063) J15B.5@27.579,80.002 ; J15B.5@27.19,80.391 27.19,78.728 IC2.4@32.512,73.406 ; IC2.4@31.962,73.406 ccw(c30.634,73.406) 31.573,74.345 ccw(c32.512,75.284) IC2.4@32.512,73.956
  Bottom Layer w0.4: J15A.5@26.801,89.146 cw(c25.862,88.207) 27.19,88.207 cw(c28.518,88.207) J15A.5@27.579,89.146 ; J15B.5@27.19,80.391 28.394,81.595 28.394,84.509 27.19,85.713 J15A.5@27.19,89.535 ; J15B.5@27.19,80.941 ccw(c27.19,82.269) 28.129,81.33 ccw(c29.068,80.391) J15B.5@27.74,80.391
Q5: IC2.5 J15A.6 J15B.6 | length 30.2
  Top Layer w0.4: J15B.6@26.64,82.931 cw(c25.312,82.931) 26.251,81.992 cw(c27.19,81.053) J15B.6@27.19,82.381 ; J15B.6@27.19,82.931 25.986,81.727 25.986,77.392 IC2.5@29.972,73.406 ; IC2.5@29.422,73.406 ccw(c28.094,73.406) 29.033,74.345 ccw(c29.972,75.284) IC2.5@29.972,73.956
  Bottom Layer w0.4: J15B.6@26.64,82.931 ccw(c25.312,82.931) 26.251,83.87 ccw(c27.19,84.809) J15B.6@27.19,83.481 ; J15A.6@26.64,92.075 cw(c25.312,92.075) 26.251,91.136 cw(c27.19,90.197) J15A.6@27.19,91.525 ; J15B.6@27.19,82.931 25.986,84.135 25.986,90.871 J15A.6@27.19,92.075
Q6: IC2.6 J15A.3 J15B.3 | length 26.7
  Top Layer w0.4: J15B.3@24.261,80.002 cw(c23.322,79.063) 24.65,79.063 cw(c25.978,79.063) J15B.3@25.039,80.002 ; J15B.3@24.65,80.391 24.65,76.188 IC2.6@27.432,73.406 ; IC2.6@26.882,73.406 ccw(c25.554,73.406) 26.493,74.345 ccw(c27.432,75.284) IC2.6@27.432,73.956
  Bottom Layer w0.4: J15B.3@24.1,80.391 ccw(c22.772,80.391) 23.711,81.33 ccw(c24.65,82.269) J15B.3@24.65,80.941 ; J15A.3@24.261,89.146 cw(c23.322,88.207) 24.65,88.207 cw(c25.978,88.207) J15A.3@25.039,89.146 ; J15B.3@24.65,80.391 23.368,81.673 23.368,86.173 24.65,87.455 J15A.3@24.65,89.535
Q7: IC2.7 J15A.4 J15B.4 U1.80 | length 71.6
  Top Layer w0.4: J15B.4@24.1,82.931 cw(c22.772,82.931) 23.711,81.992 cw(c24.65,81.053) J15B.4@24.65,82.381 ; J15B.4@24.261,83.32 ccw(c23.351,84.23) 24.638,84.23 ; IC2.7@24.342,73.406 ccw(c23.014,73.406) 23.953,74.345 ccw(c24.892,75.284) IC2.7@24.892,73.956 ; J15B.4@24.638,82.943 24.638,85.979 25.854,87.195 25.854,90.871 J15A.4@24.65,92.075 ; 24.638,84.288 ccw(c26.007,84.288) J15B.4@25.039,83.32 ; J15B.4@24.65,82.931 23.368,81.649 23.368,74.93 IC2.7@24.892,73.406 ; J15A.4@24.65,91.525 cw(c24.65,90.197) 25.589,91.136 cw(c26.528,92.075) J15A.4@25.2,92.075
  Bottom Layer w0.4: J15B.4@24.638,82.943 J15B.4@24.65,82.931 ; IC2.7@24.892,72.856 cw(c24.892,71.528) 25.831,72.467 cw(c26.77,73.406) IC2.7@25.442,73.406 ; IC2.7@24.892,73.406 26.134,72.164 26.134,62.079 33.603,54.61 38.1,54.61 42.154,50.556 45.871,50.556 U1.80@47.207,49.22 ; U1.80@46.657,49.22 ccw(c45.329,49.22) 46.268,50.159 ccw(c47.207,51.098) U1.80@47.207,49.77
Q8: IC2.9
RD+: Ethernet.4 U1.33 | length 41
  Bottom Layer w0.4: U1.33@97.618,43.751 cw(c96.679,42.812) 98.007,42.812 cw(c99.335,42.812) U1.33@98.396,43.751 ; U1.33@98.007,44.14 98.007,40.677 98.679,40.005 98.679,26.162 101.727,23.114 101.727,18.542 105.535,14.734 105.535,13.675 Ethernet.4@107.82,11.39 ; Ethernet.4@107.27,11.39 ccw(c105.942,11.39) 106.881,12.329 ccw(c107.82,13.268) Ethernet.4@107.82,11.94
RD-: Ethernet.6 U1.32 | length 41
  Bottom Layer w0.4: U1.32@100.158,43.751 cw(c99.219,42.812) 100.547,42.812 cw(c101.875,42.812) U1.32@100.936,43.751 ; U1.32@100.547,44.14 100.547,40.677 101.219,40.005 101.219,35.137 101.221,35.135 101.221,25.401 102.889,23.733 102.889,18.861 Ethernet.6@110.36,11.39 ; Ethernet.6@109.81,11.39 ccw(c108.482,11.39) 109.421,12.329 ccw(c110.36,13.268) Ethernet.6@110.36,11.94
TCK: J3.9 U1.57 | length 26
  Top Layer w0.4: J3.9@102.489,34.417 109.503,41.431 109.503,48.016 U1.57@113.247,51.76 ; J3.9@102.489,34.967 ccw(c102.489,36.295) 103.428,35.356 ccw(c104.367,34.417) J3.9@103.039,34.417 ; U1.57@112.697,51.76 cw(c111.369,51.76) 112.308,50.821 cw(c113.247,49.882) U1.57@113.247,51.21
TD+: Ethernet.1 U1.35 | length 44.1
  Bottom Layer w0.4: U1.35@92.538,43.751 cw(c91.599,42.812) 92.927,42.812 cw(c94.255,42.812) U1.35@93.316,43.751 ; U1.35@92.927,44.14 92.927,41.058 93.533,40.452 93.533,26.665 99.822,20.376 99.822,17.526 102.452,14.896 102.452,10.408 Ethernet.1@104.01,8.85 ; Ethernet.1@103.46,8.85 ccw(c102.132,8.85) 103.071,9.789 ccw(c104.01,10.728) Ethernet.1@104.01,9.4
TD-: Ethernet.3 U1.34 | length 44.5
  Bottom Layer w0.4: U1.34@95.078,43.751 cw(c94.139,42.812) 95.467,42.812 cw(c96.795,42.812) U1.34@95.856,43.751 ; U1.34@95.467,44.14 95.467,41.185 96.139,40.513 96.139,26.543 100.838,21.844 100.838,18.034 103.722,15.15 103.722,10.922 104.458,10.186 105.214,10.186 Ethernet.3@106.55,8.85 ; Ethernet.3@106,8.85 ccw(c104.672,8.85) 105.611,9.789 ccw(c106.55,10.728) Ethernet.3@106.55,9.4
TDI: J3.5 U1.59 | length 30.2
  Top Layer w0.4: J3.5@107.569,34.417 114.808,41.656 114.808,55.279 U1.59@113.247,56.84 ; J3.5@107.569,34.967 ccw(c107.569,36.295) 108.508,35.356 ccw(c109.447,34.417) J3.5@108.119,34.417 ; U1.59@113.247,56.29 cw(c113.247,54.962) 114.186,55.901 cw(c115.125,56.84) U1.59@113.797,56.84
TDO: J3.13 U1.58 | length 30.7
  Top Layer w0.4: J3.13@97.409,34.417 97.607,34.417 106.963,43.773 106.963,48.016 U1.58@113.247,54.3 ; J3.13@97.409,34.967 ccw(c97.409,36.772) 98.685,35.496 ; J3.13@97.959,34.417 cw(c98.809,34.417) 98.208,35.018 ; U1.58@112.697,54.3 cw(c111.369,54.3) 112.308,53.361 cw(c113.247,52.422) U1.58@113.247,53.75
TMS: J3.7 U1.56 | length 22.4
  Top Layer w0.4: J3.7@105.029,34.417 112.014,41.402 112.014,47.987 U1.56@113.247,49.22 ; J3.7@105.029,34.967 ccw(c105.029,36.295) 105.968,35.356 ccw(c106.907,34.417) J3.7@105.579,34.417 ; U1.56@112.697,49.22 cw(c111.369,49.22) 112.308,48.281 cw(c113.247,47.342) U1.56@113.247,48.67
TRST: J3.3 U1.60 | length 32.7
  Top Layer w0.4: J3.3@110.109,34.417 115.951,40.259 115.951,56.676 U1.60@113.247,59.38 ; J3.3@110.109,34.967 ccw(c110.109,36.295) 111.048,35.356 ccw(c111.987,34.417) J3.3@110.659,34.417 ; U1.60@113.247,58.83 cw(c113.247,57.502) 114.186,58.441 cw(c115.125,59.38) U1.60@113.797,59.38
"USB D+": U1.37 USB.3 | length 115.4
  Top Layer w0.4: USB.3@7.095,8.473 cw(c7.095,7.024) 8.119,8.049 cw(c9.144,9.073) USB.3@7.695,9.073 ; USB.3@7.183,9.073 USB.3@7.095,9.073 8.675,7.493 10.414,7.493 11.176,8.255 11.176,10.414 14.859,14.097 80.137,14.097 ; 80.145,14.089 82.55,16.493 82.55,20.32 87.249,25.019 87.249,41.148 87.847,41.746 U1.37@87.847,44.14 ; U1.37@87.458,43.751 cw(c86.519,42.812) 87.847,42.812 cw(c89.175,42.812) U1.37@88.236,43.751
"USB D-": U1.36 USB.2 | length 122.4
  Top Layer w0.4: USB.2@6.495,11.073 cw(c5.046,11.073) 6.071,10.049 cw(c7.095,9.024) USB.2@7.095,10.473 ; USB.2@7.095,11.073 5.841,9.819 5.841,8.002 7.239,6.604 10.795,6.604 12.192,8.001 12.192,10.033 15.24,13.081 80.772,13.081 83.693,16.002 83.693,19.939 88.138,24.384 88.138,40.259 90.387,42.508 U1.36@90.387,44.14 ; U1.36@89.998,43.751 cw(c89.059,42.812) 90.387,42.812 cw(c91.715,42.812) U1.36@90.776,43.751
VCC: C14.1 IC2.10 IC2.16 J15_S.2 J15A.16 J15B.16 P2.1 R33.1 | length 136.1
  Top Layer w0.6: J15_S.2@24.442,54.737 ccw(c23.356,54.737) 24.124,55.505 ccw(c24.892,56.273) J15_S.2@24.892,55.187 ; R33.1@24.442,62.484 cw(c23.356,62.484) 24.124,61.716 cw(c24.892,60.948) R33.1@24.892,62.034 ; R33.1@24.574,62.802 ccw(c23.806,63.57) 24.892,63.57 ccw(c25.978,63.57) R33.1@25.21,62.802 ; IC2.10@24.574,65.468 cw(c23.806,64.7) 24.892,64.7 cw(c25.978,64.7) IC2.10@25.21,65.468 ; J15_S.2@24.892,54.737 22.733,56.896 22.733,60.325 R33.1@24.892,62.484 24.892,64.482 ; IC2.10@24.892,65.786 24.892,64.482 ; IC2.16@39.682,65.786 cw(c38.596,65.786) 39.364,65.018 cw(c40.132,64.25) IC2.16@40.132,65.336 ; IC2.16@39.814,65.468 cw(c39.046,64.7) 40.132,64.7 cw(c41.218,64.7) IC2.16@40.45,65.468 ; C14.1@40.64,63.119 40.132,63.627 IC2.16@40.132,65.786 38.828,64.482 24.892,64.482
  Bottom Layer w0.6: J15_S.2@24.442,54.737 ccw(c23.356,54.737) 24.124,55.505 ccw(c24.892,56.273) J15_S.2@24.892,55.187 ; J15_S.2@24.892,54.737 17.399,62.23 17.399,89.789 21.336,93.726 38.239,93.726 J15A.16@39.89,92.075 41.275,90.69 ; J15A.16@39.44,92.075 ccw(c38.354,92.075) 39.122,92.843 ccw(c39.89,93.611) J15A.16@39.89,92.525 ; J15B.16@39.89,82.931 41.275,84.316 41.275,90.69 ; J15B.16@39.89,83.381 ccw(c39.89,84.467) 40.658,83.699 ccw(c41.426,82.931) J15B.16@40.34,82.931 ; J15A.16@39.89,91.625 cw(c39.89,90.539) 40.658,91.307 cw(c41.426,92.075) J15A.16@40.34,92.075 ; P2.1@51.724,88.392 ccw(c50.275,88.392) 51.3,89.416 ccw(c52.324,90.441) P2.1@52.324,88.992 ; P2.1@52.324,88.392 50.026,90.69 41.275,90.69
pads on no net: "MIDI IN1.0" "MIDI IN1.1" "MIDI IN1.2" "MIDI IN1.3" "MIDI IN2.0" "MIDI IN2.1" "MIDI IN2.2" "MIDI IN2.3" "MIDI OUT1.0" "MIDI OUT1.1" "MIDI OUT1.3" "MIDI OUT2.0" "MIDI OUT2.1" "MIDI OUT2.3" Ethernet.2 Ethernet.5 Ethernet.7 Ethernet.MH3 Ethernet.MH4 IC4.1 IC4.4 IC5.1 IC5.4 J3.15 J13.2 J21.2 J28.5 R2.5 U1.2 U1.3 U1.4 U1.24 U1.29 U1.30 U1.31 U1.61 U1.63 U1.64 U1.65 U1.67

## Polygon pours and split planes (outlines as drawn)
GND on Top Layer "Top-GND" (hatched 45Degree grid 0.508 track 0.23, remove dead copper, pour order 2): -1.27,-3.81 -1.27,95.631 118.11,95.631 118.11,-3.81
GND on Bottom Layer "Bottom-GND" (hatched 45Degree grid 0.508 track 0.23, remove dead copper, pour order 4): -1.27,-3.81 -1.27,95.631 118.11,95.631 118.11,-3.81

## Other copper
Top Layer:
  text "MBHP_CORE_LPC17 V1.0" at 11.049,47.371 h2.7 r90
  text "Top" at 28.067,33.909 h1.8 r90
  text "(c) midibox.org" at 26.289,29.083 h2 r90
Bottom Layer:
  text "(c) midibox.org" at 26.162,40.64 h2 r90
  text "Bottom" at 28.194,37.084 h1.8 r90

## Silkscreen, mask and mechanical layers (free items; w line width, h text height)
Top Overlay:
  lines w0.2: 29.21,77.461 29.21,78.74 32.893,78.74 32.893,77.461 ; 29.21,86.605 29.21,87.884 32.893,87.884 32.893,86.605
  text "Vs" at 64.516,93.98 h0.6
  text "SI" at 84.963,93.853 h0.6
  text "5Vd" at 87.122,93.853 h0.6
  text "Vs" at 90.297,93.853 h0.6
  text "RC2" at 79.629,93.726 h0.6
  text "SC" at 82.423,93.726 h0.6
  text "SI" at 105.283,93.726 h0.6
  text "5Vd" at 107.823,93.726 h0.6
  text "RC2" at 100.203,93.599 h0.6
  text "SC" at 102.997,93.599 h0.6
  text "Vs" at 110.363,93.599 h0.6
  text "B-" at 21.844,93.345 h0.6
  text "D7" at 24.384,93.345 h0.6
  text "D5" at 26.797,93.345 h0.6
  text "D3" at 29.337,93.345 h0.6
  text "D1" at 31.877,93.345 h0.6
  text "E" at 34.544,93.345 h0.6
  text "RS" at 36.83,93.345 h0.6
  text "Vd" at 39.116,93.345 h0.6
  text "SC" at 103.124,88.011 h0.6
  text "RC1" at 100.351,87.962 h0.6
  text "RC1" at 79.883,87.884 h0.6
  text "SC" at 82.423,87.884 h0.6
  text "SO" at 85.217,87.884 h0.6
  text "5Vcc" at 87.376,87.884 h0.6
  text "Vs" at 90.297,87.884 h0.6
  text "SO" at 105.537,87.884 h0.6
  text "5Vd" at 107.823,87.884 h0.6
  text "Vs" at 110.363,87.884 h0.6
  text "A7" at 59.436,87.757 h0.6
  text "A6" at 61.976,87.757 h0.6
  text "A5" at 64.389,87.757 h0.6
  text "A4" at 67.056,87.757 h0.6
  text "3.3Vd" at 69.088,87.757 h0.6
  text "B+" at 21.717,87.376 h0.6
  text "D6" at 24.257,87.376 h0.6
  text "D4" at 26.67,87.376 h0.6
  text "RW" at 34.417,87.376 h0.6
  text "V0" at 37.084,87.376 h0.6
  text "Vs" at 39.497,87.249 h0.6
  text "D2" at 29.591,86.995 h0.6
  text "D0" at 31.623,86.995 h0.6
  text "B-" at 21.717,84.455 h0.6
  text "D7" at 24.384,84.455 h0.6
  text "D5" at 26.797,84.455 h0.6
  text "D3" at 29.337,84.455 h0.6
  text "D1" at 31.877,84.328 h0.6
  text "E" at 34.544,84.201 h0.6
  text "RS" at 36.83,84.201 h0.6
  text "Vd" at 39.243,84.201 h0.6
  text "Vs" at 71.882,82.931 h0.6
  text "B+" at 21.59,78.359 h0.6
  text "D6" at 24.13,78.359 h0.6
  text "D4" at 26.797,78.359 h0.6
  text "RW" at 34.544,78.359 h0.6
  text "V0" at 37.084,78.359 h0.6
  text "Vs" at 39.243,78.232 h0.6
  text "D2" at 29.591,77.851 h0.6
  text "D0" at 31.496,77.851 h0.6
  text "3.3Vd" at 76.708,76.835 h0.6
  text "A3" at 67.056,76.708 h0.6
  text "A2" at 69.596,76.708 h0.6
  text "A1" at 72.263,76.708 h0.6
  text "A0" at 74.676,76.708 h0.6
  text "Vs" at 46.482,74.295 h0.6
  text "SC" at 48.895,74.295 h0.6
  text "SD" at 51.562,74.295 h0.6
  text "5Vd" at 54.483,74.295 h0.6
  text "+5V" at 26.924,59.055 h2
  text "+5V" at 20.193,56.769 h2
  text "GND" at 34.163,54.356 h0.6
  text "GND" at 36.83,54.356 h0.6
  text "LCD" at 19.05,54.102 h2
  text "Vs" at 27.813,51.816 h2
  text "3.3Vd" at 34.544,51.435 h0.6
  text "+3.3V" at 18.542,51.181 h2
  text "I2SSDA" at 36.83,46.355 h0.6
  text "I2SCLK" at 32.512,43.815 h0.6
  text "I2SCLK" at 36.957,43.815 h0.6
  text "I2SWS" at 37.338,41.318 h0.6
  text "I2SMCLK" at 32.512,41.275 h0.6
  text "Vs" at 73.787,37.211 h0.6
  text "SC" at 76.2,37.211 h0.6
  text "SD" at 78.867,37.211 h0.6
  text "5Vd" at 81.788,37.211 h0.6
  text "SI" at 41.021,36.068 h0.6
  text "RC2" at 35.814,35.941 h0.6
  text "SC" at 38.481,35.941 h0.6
  text "3.3Vd" at 43.053,35.941 h0.6
  text "Vs" at 46.609,35.941 h0.6
  text "D2" at 61.595,35.941 h0.6
  text "D6" at 56.515,35.814 h0.6
  text "D4" at 59.055,35.814 h0.6
  text "D0" at 64.135,35.814 h0.6
  text "Vs" at 66.421,35.814 h0.6
  text "SO" at 41.021,30.099 h0.6
  text "RC1" at 35.941,29.972 h0.6
  text "SC" at 38.481,29.972 h0.6
  text "3.3Vd" at 42.672,29.972 h0.6
  text "D7" at 56.642,29.972 h0.6
  text "D5" at 59.182,29.972 h0.6
  text "D3" at 61.722,29.972 h0.6
  text "D1" at 64.389,29.972 h0.6
  text "Vs" at 46.482,29.845 h0.6
  text "3.3Vd" at 66.294,29.845 h0.6
  text "JTAG" at 109.22,25.908 h4
  text "optional" at 111.633,24.511 h2
  text "Vs" at 114.935,23.233 h0.6
  text "USB" at 4.572,20.447 h2
  text "Power" at 4.699,18.796 h2
  text "Option" at 6.096,17.145 h2
Poly:
  lines w0.05: -1.27,-3.81 118.11,-3.81 118.11,95.631 -1.27,95.631 -1.27,-3.81
BoardMeasuring:
  text "Zeropoint" at -17.907,-6.985 h4
Drill Drawing:
  text ".Legend" at 7.475,122.496 h1.5
BoardOutline:
  circle w0.05: c0,0 r0.5
  lines w0.05: -1.5,-4 118.5,-4 118.5,96 -1.5,96 -1.5,-4

## Dimensions
-1.5,-4 to 118.5,-4 on BoardMeasuring
118.5,-4 to 118.5,96 on BoardMeasuring
0,0 to -5.08,-3.048 on BoardMeasuring

## Text inside footprints (layer, text, board x,y; h text height)
C8: Top Overlay "+" at 7.366,41.656 h1.5 r180
C10: Top Overlay "+" at -0.889,53.848 h1
C12: Top Overlay "+" at -1.706,73.825 h1
J3: Top Overlay "1" at 114.808,34.036 h1.27
J5A: Top Overlay "1" at 79.585,81.397 h1.27
J5B: Top Overlay "1" at 71.882,92.143 h1.27
J8/9: Top Overlay "1" at 113.03,91.889 h1.27
J10: Top Overlay "1" at 69,34.29 h1.27
J15A: Top Overlay "1" at 41.783,88.773 h1.27
J15B: Top Overlay "1" at 41.783,79.756 h1.27
J16: Top Overlay "1" at 48.485,34.544 h1.27
J19: Top Overlay "1" at 92.202,91.889 h1.27
J28: Top Overlay "1" at 33.02,53.086 h1.27
P1: Top Overlay "CW" at 13.97,85.979 h0.7
P2: Top Overlay "CW" at 52.832,85.852 h0.7
USB: BaseArea "PCB Edge" at 2.693,-3.612 h0.25
X1: Top Overlay "+" at 12.303,25.889 h2 r90; Top Overlay "-" at 14.283,20.919 h2 r90; Top Overlay "~" at 12.213,20.789 h2 r90; Top Overlay "~" at 14.333,25.849 h2 r90